# EAGLE board EagleAssignment (EAGLE 6.6.0)
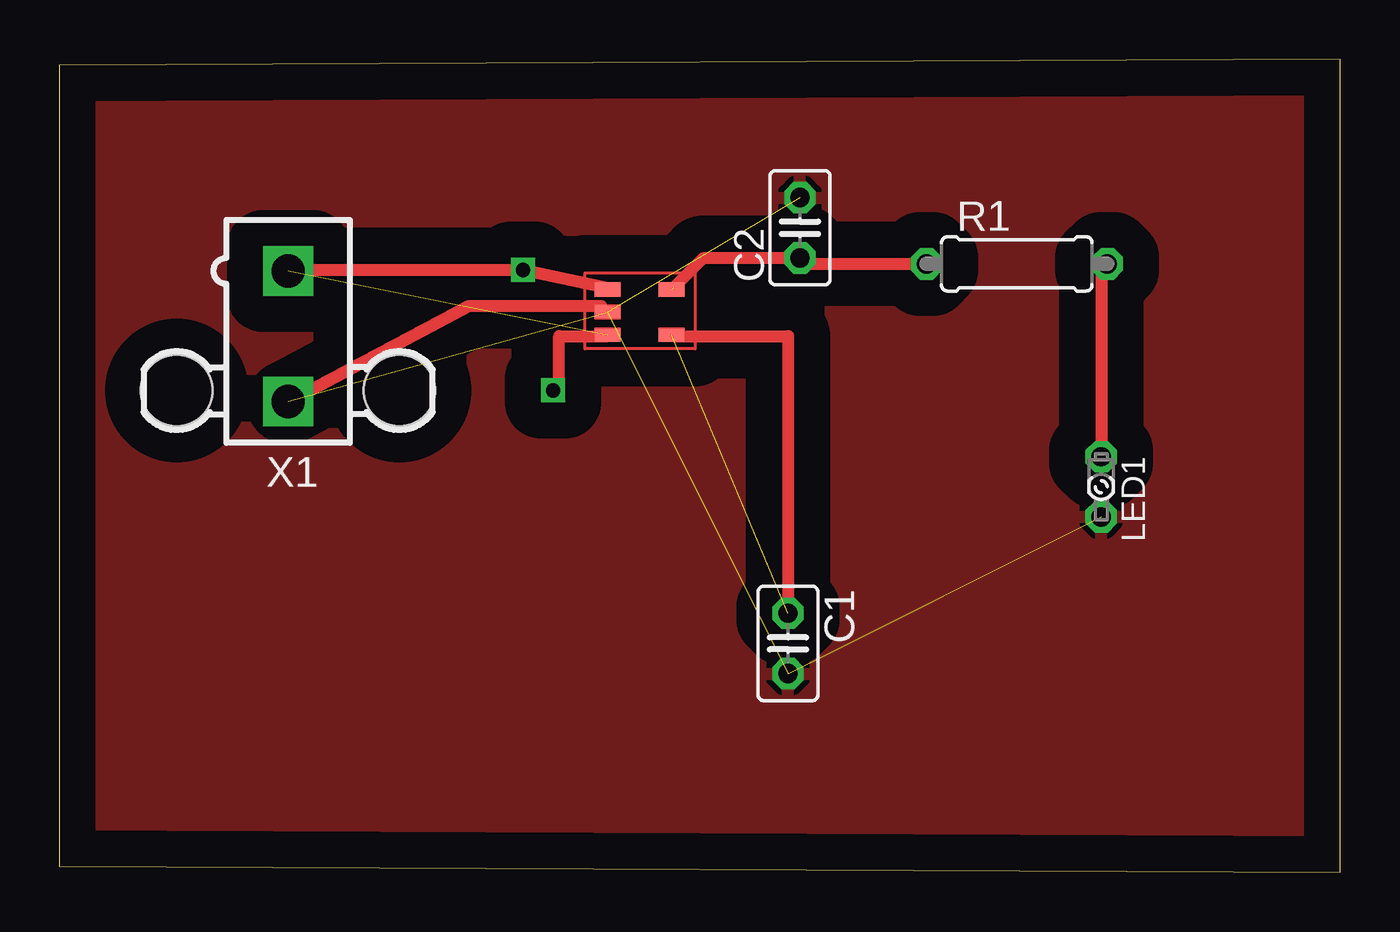
[diagram p0: board, top side]
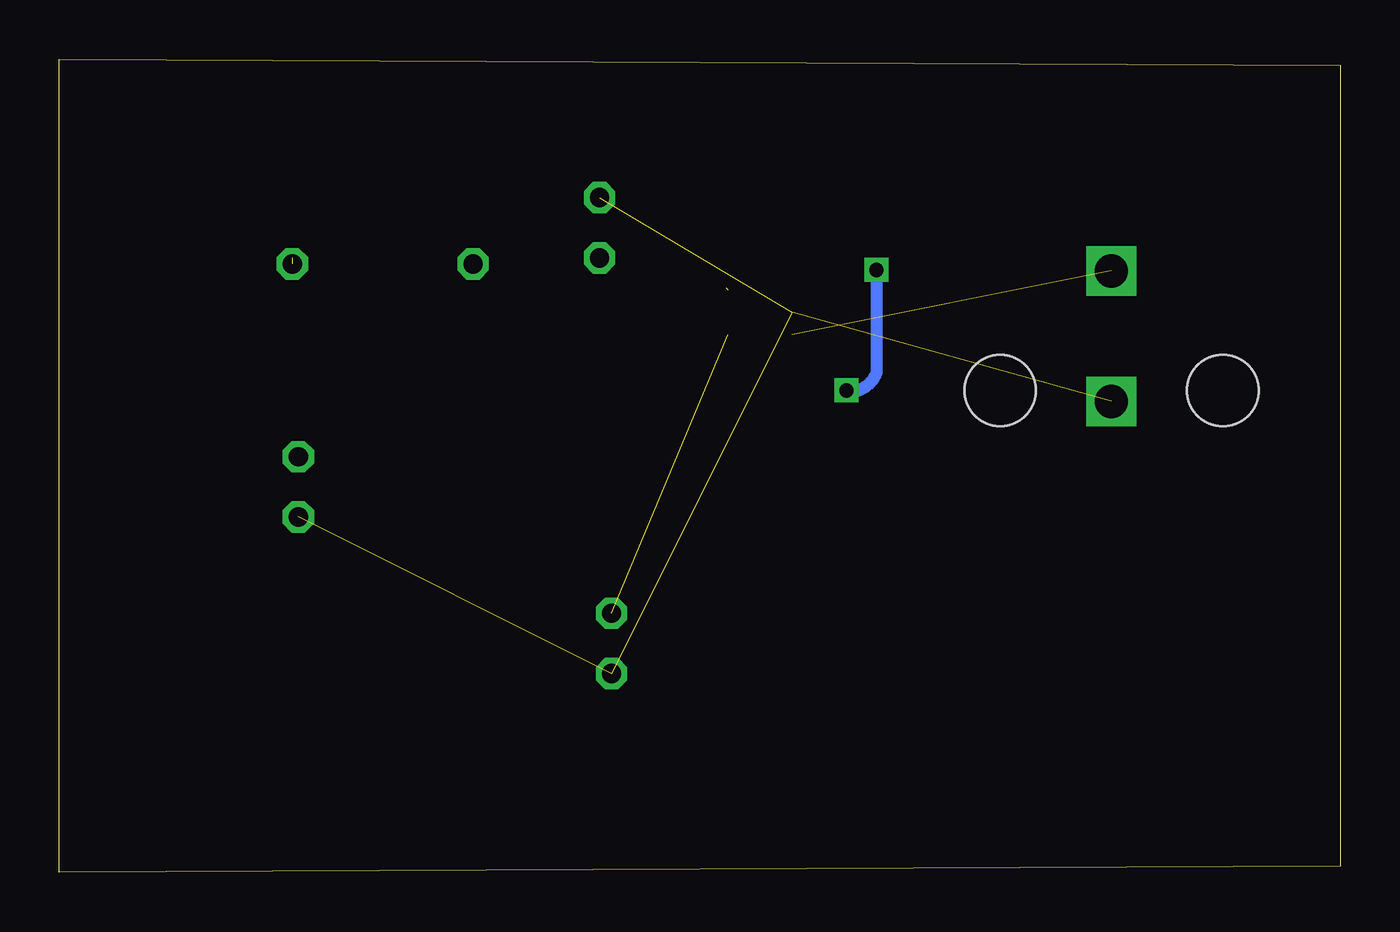
[diagram p1: board, bottom side, seen from below]

Size 54.03 x 34.28 mm. Coordinates in mm from the lower left corner, seen from the top.
Outline: 0,0.25 54.03,0 54.03,34.28 0,34.03 0,0.25
Copper layers (1*16): Top 0.035mm / dielectric 1.5mm / Bottom 0.035mm
Design rules "default": minimum track width 10mil, minimum drill 24mil, track to track 8mil, track to pad 8mil, pad to pad 8mil, via to via 8mil, smd to smd 8mil, copper to edge 40mil, drill to drill 8mil, minimum pad ring 10mil, minimum via ring 8mil, stop-mask expansion 4mil, vias tented up to drill 0mil, thermal gap 10mil

## Footprints (pad centres in the part's own frame; a part is rotated, then mirrored left to right if it is on the bottom)
C025-025X050 = drill 0.813 octagon: 1 -1.27,0; 2 1.27,0
LSU260 = drill 0.813 octagon: A -1.27,0; K 1.27,0
0207/7 = drill 0.813 octagon: 1 -3.81,0; 2 3.81,0
TSP799 = smd 1.1 x 0.6: EN -0.25,-0.95; GND -0.25,0; IN -0.25,0.95; NR 2.45,-0.95; OUT 2.45,0.95; P$3 -0.25,-0.95
5566-2 = drill 1.4 square: 1 0,-2.75; 2 0,2.75 | hole 3: 4.7,2.29; -4.7,2.29

## Placement (x,y rotation side)
C1  2.2 uF  [C025-025X050]  30.73,9.65 270 top
C2  2.2 uF  [C025-025X050]  31.24,27.18 90 top
LED1  [LSU260]  43.94,16.26 270 top
R1  100  [0207/7]  40.39,25.65 0 top
U$1  TSP799  [TSP799]  23.37,23.62 0 top
X1  5566-2  [5566-2]  9.65,22.61 180 top

## Library data of the parts
C1 C2 R1 = rcl
LED1 = led
U$1 = TSP799
X1 = con-molex; OC_FARNELL: 1822072; OC_NEWARK: unknown

## Nets
GND: C1.2 C2.2 LED1.K U$1.GND X1.2
N$1: C1.1 U$1.NR
N$3: C2.1 R1.1 U$1.OUT
N$4: LED1.A R1.2
N$5: U$1.EN X1.1

## Tracks (layer width: path | path; a pad name or v marks a point on that pad's centre or on a via)
GND  (4 unrouted)
  pour Top (isolate 1.524): -0.25,0.25 54.1,0.25 54.1,34.29 -0.25,34.29
N$1  (1 unrouted)
N$2
  Top 0.508: 22.86,23.88 17.27,23.88 9.65,19.81
N$3  (1 unrouted)
  Top 0.508: 25.91,24.64 27.18,25.91 C2.1 31.5,25.65 R1.1
N$4  (1 unrouted)
  Top 0.508: 44.2,25.91 43.94,25.91 LED1.A
N$5  (1 unrouted)
N$7
  Top 0.508: 25.91,22.61 30.73,22.61 30.73,10.92
N$9  (via drill 0.6)
  Top 0.508: 10.16,25.4 v19.56,25.4 23.11,24.64
  Bottom 0.508: v19.56,25.4 19.56,21.08 arc90 21.08,20.32
N$10  (via drill 0.6)
  other vias: 20.83,20.32
N$11
  Top 0.508: 21.08,20.32 21.08,22.61 23.11,22.61